# Altium PCB sanpell_cpu_v5.0.4.pcbdoc (part 2 of 2)
Units mm, origin at the board's own origin, x right, y up, seen from the top; angles counter-clockwise.
Board outline 91.48 x 91.59 mm, 4 copper layers (Top Layer, PWR, GND, Bottom Layer); 81 components, 92 nets, 356 pads, 103 vias.
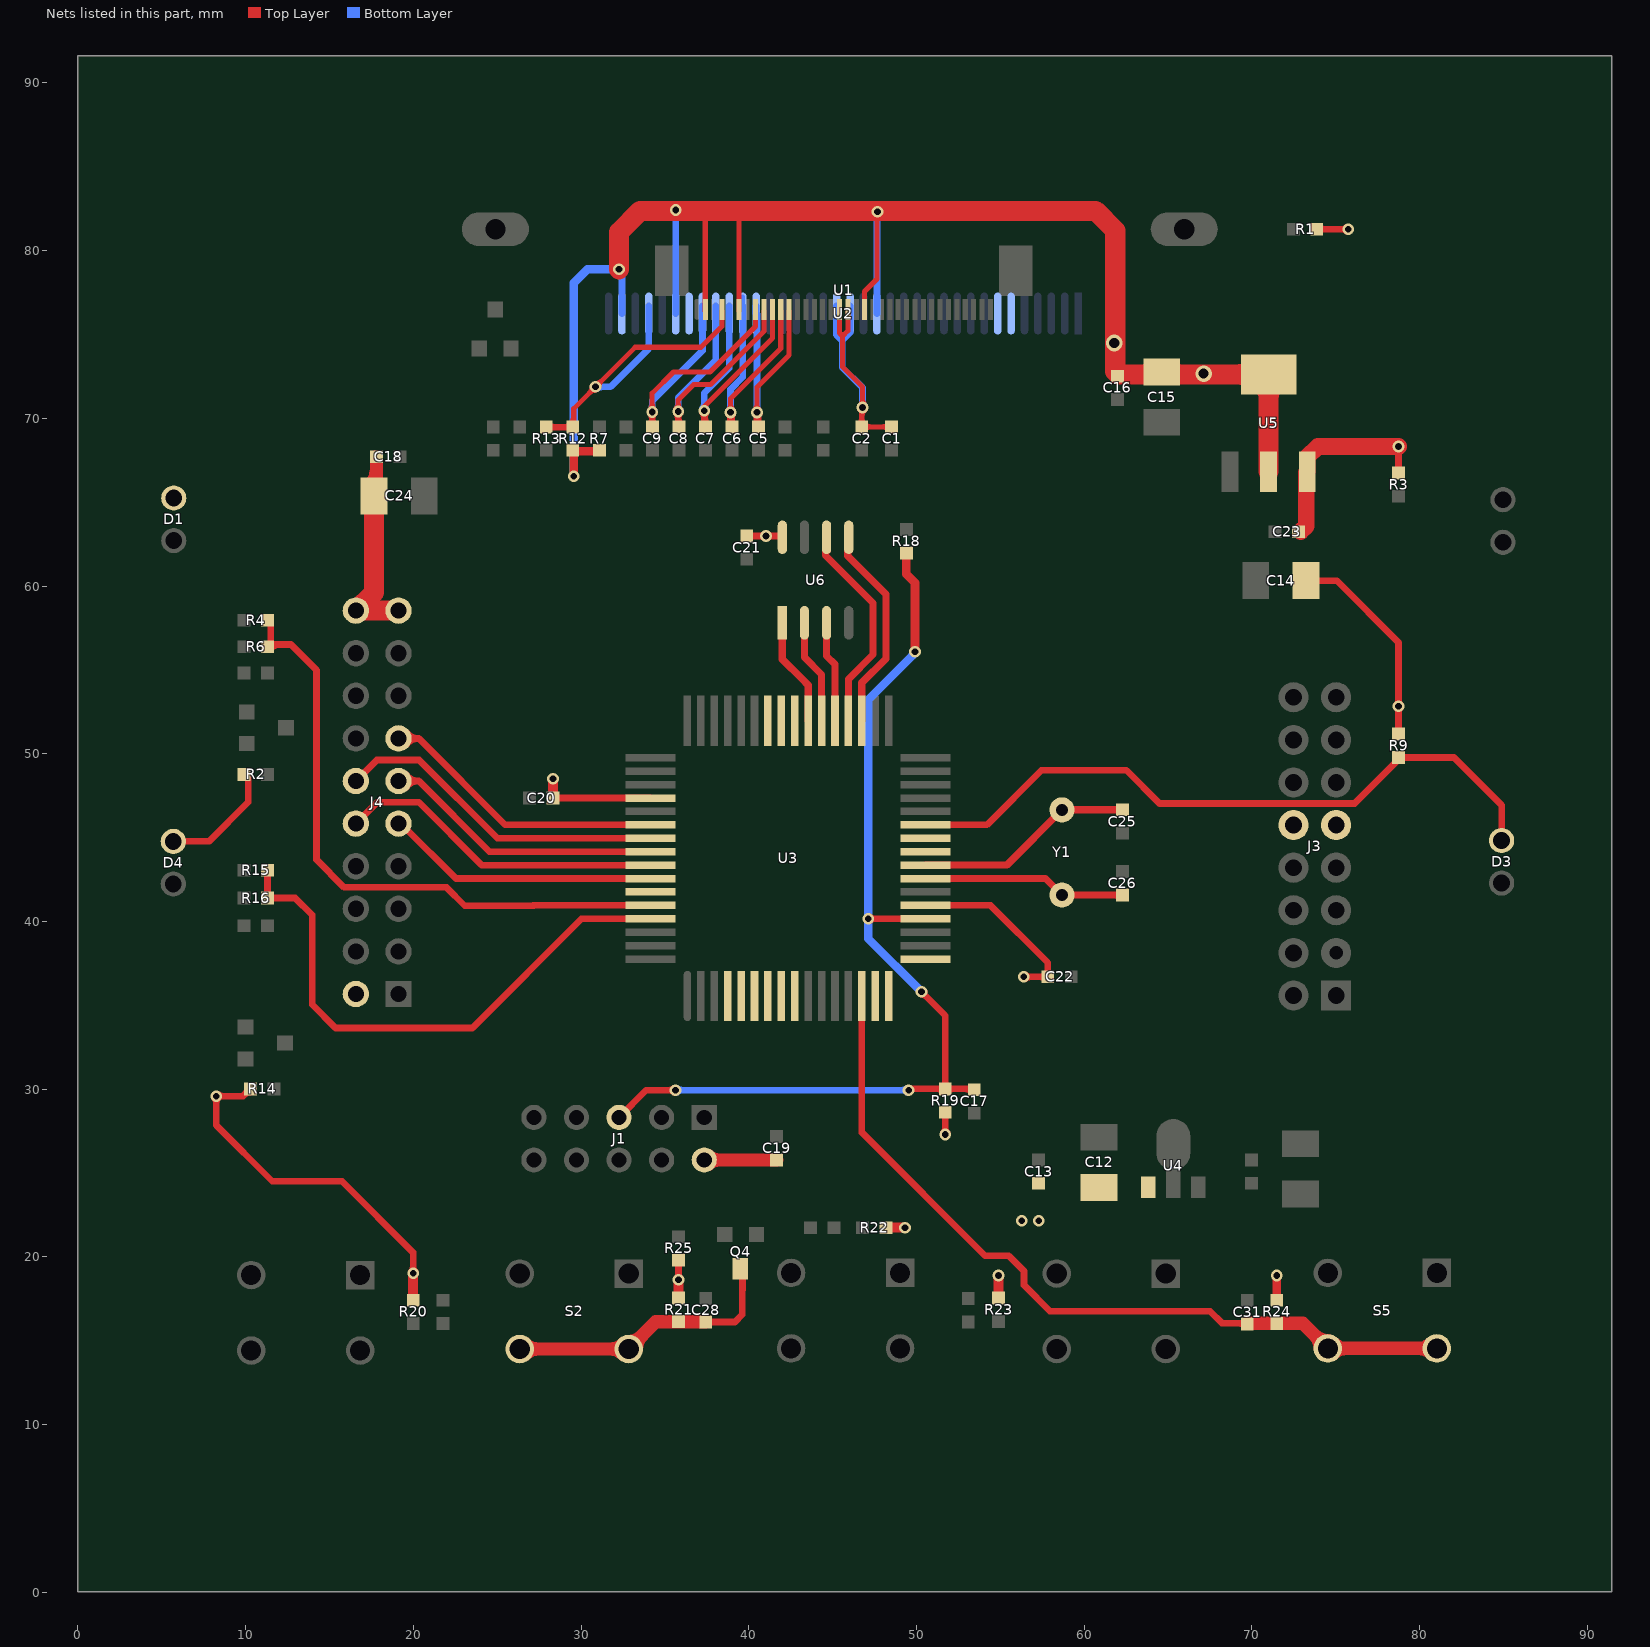
[diagram p4: the nets of this part, all layers, seen from the top]

## Via types
v1: diameter 0.7, hole 0.4, Top Layer to Bottom Layer, 99 vias
v2: diameter 1, hole 0.6, Top Layer to Bottom Layer, 4 vias

## Nets (pads, with @x,y where several pads share a name; then routed paths per layer and width w, separated by ;. In a path a pad name is that pad's centre, name@x,y a point inside that pad or via, vN(x,y) a via of type N, cw(c..) or ccw(c..) an arc to the next point about the centre after c; other vN are vias at no path point) (continued)
PB4: C31.2 R24.1 S5.2 U3.14 | length 53.9
  Top Layer w0.4: U3.14@46.742,35.564 46.742,27.426 54.102,20.066 55.507,20.066 56.407,19.166 56.407,18.32 57.963,16.764 67.508,16.764 68.219,16.053 C31.2@69.723,16.053 ; 69.163,16.053 cw(c69.163,15.442) C31.2@69.595,15.874
  Top Layer w0.508: R24.1@71.476,16.027 R24.1@71.501,16.053
  Top Layer w0.8: C31.2@69.723,16.053 71.501,16.053 73.023,16.053 S5.2@74.526,14.55 S5.2@81.026,14.55 ; S5.2@74.076,14.55 ccw(c72.99,14.55) 73.758,15.318 ccw(c74.526,16.086) S5.2@74.526,15 ; S5.2@74.844,14.232 cw(c75.612,13.464) 75.612,14.55 cw(c75.612,15.636) S5.2@74.844,14.868 ; S5.2@80.708,14.232 ccw(c79.94,13.464) 79.94,14.55 ccw(c79.94,15.636) S5.2@80.708,14.868
PB5: U3.15
PB6: U3.16
PB7: U3.17
PC0: U3.35 U6.5 | length 12.7
  Top Layer w0.432: 45.907,61.914 cw(c46.231,61.914) U6.5@46.002,62.144 ; U6.5@45.907,62.91 45.907,61.789 48.177,59.519 48.177,55.67 46.742,54.235 U3.35@46.742,51.964
PC1: U3.36 U6.6 | length 13
  Top Layer w0.432: 44.577,61.891 cw(c44.935,61.891) U6.6@44.682,62.144 ; U6.6@44.577,62.91 44.577,61.824 47.407,58.994 47.407,55.916 45.942,54.451 U3.36@45.942,51.964
PC2: U3.37 U6.3 | length 6.1
  Top Layer w0.432: U6.3@44.64,57.81 44.64,55.837 45.142,55.335 U3.37@45.142,51.964
PC3: U3.38 U6.2 | length 6.3
  Top Layer w0.432: U6.2@43.32,57.81 43.32,55.753 44.342,54.731 U3.38@44.342,51.964
PC4: U3.39 U6.1 | length 7
  Top Layer w0.432: U6.1@42,57.81 42,55.638 43.167,54.47 ; 42.824,54.813 43.167,54.47 ; U3.39@43.542,51.964 43.542,54.096 43.167,54.47
PC5: U3.40
PC6: U3.41
PC7: U3.42
PD0: U3.25
PD1: U3.26
PD2: D3.1 R9.2 U3.27 | length 41.7
  Top Layer w0.4: U3.27@50.542,45.764 54.193,45.764 57.451,49.022 62.51,49.022 64.49,47.042 76.125,47.042 78.74,49.657 R9.2@78.74,49.784 82.042,49.784 84.887,46.939 D3.1@84.887,44.831 ; R9.2@78.868,49.656 cw(c79.177,49.347) 79.177,49.784 cw(c79.177,50.221) R9.2@78.868,49.912
PE2: U3.4
PE3: U3.5
PE4: U3.6
PE5: U3.7
PE6: U3.8
PE7: U3.9
PF0: R15.1 R16.1 U3.61 | length 35.4
  Top Layer w0.4: R16.1@11.175,41.53 ccw(c10.866,41.839) 11.303,41.839 ccw(c11.74,41.839) 11.431,41.53 ccw(c11.74,41.839) 11.74,41.402 ccw(c11.74,40.965) R16.1@11.431,41.274 ; R15.1@11.175,42.925 cw(c10.866,42.616) 11.303,42.616 cw(c11.74,42.616) R15.1@11.431,42.925 ; R16.1@11.303,41.402 R15.1@11.303,43.053 ; R16.1@11.506,41.402 12.954,41.402 13.97,40.386 13.97,35.052 15.367,33.655 23.52,33.655 30.03,40.164 U3.61@34.142,40.164
PF1: R4.1 R6.1 U3.60 | length 38
  Top Layer w0.4: R6.1@11.431,56.26 cw(c12.047,55.644) 12.047,56.515 ; R6.1@11.506,56.439 R4.1@11.506,57.963 ; R6.1@11.532,56.413 11.633,56.515 12.7,56.515 14.224,54.991 14.224,43.688 15.875,42.037 21.971,42.037 23.063,40.945 27.178,40.945 27.159,40.964 U3.60@34.142,40.964
PF2: U3.59
PF3: J4.9 U3.58 | length 16.2
  Top Layer w0.4: J4.9@19.431,45.84 19.431,45.675 22.542,42.564 U3.58@34.142,42.564
PF4: J4.10 U3.57 | length 19.6
  Top Layer w0.4: J4.10@16.576,45.84 17.853,47.117 20.32,47.117 24.073,43.364 U3.57@34.142,43.364
PF5: J4.11 U3.56 | length 18.5
  Top Layer w0.4: J4.11@19.116,48.38 20.327,48.38 ; J4.11@19.577,48.016 cw(c20.327,47.424) 20.327,48.38 ; J4.11@19.577,48.743 ccw(c20.327,49.335) 20.327,48.38 ; U3.56@34.142,44.164 24.543,44.164 20.327,48.38
PF6: J4.12 U3.55 | length 20
  Top Layer w0.4: J4.12@16.576,48.38 17.825,49.629 20.348,49.629 25.013,44.964 U3.55@34.142,44.964
PF7: J4.13 U3.54 | length 18.9
  Top Layer w0.4: J4.13@19.116,50.92 20.327,50.92 ; J4.13@19.577,50.556 cw(c20.327,49.964) 20.327,50.92 ; J4.13@19.577,51.283 ccw(c20.327,51.875) 20.327,50.92 ; U3.54@34.142,45.764 25.483,45.764 20.327,50.92
PS: R12.2 R13.2 U1.33 U2.33 | length 24.8
  Top Layer w0.305: R12.2@29.349,69.656 ccw(c28.824,70.18) 29.566,70.18 ; R12.2@29.566,69.52 29.566,70.581 33.227,74.242 37.158,74.242 38.407,75.491 U1.33@38.407,76.403 ; 29.566,69.912 ccw(c29.928,69.912) R12.2@29.672,69.656 ; 30.519,71.535 ccw(c30.172,71.882) v1@30.663,71.882 ; 30.534,71.549 cw(c30.861,71.222) v1@30.861,71.684 ; v1@30.861,72.08 ccw(c30.861,72.571) 31.208,72.224 ; v1@31.059,71.882 cw(c31.521,71.882) 31.194,72.209
  Top Layer w0.4: R13.2@28.016,69.469 R12.2@29.566,69.469 ; R13.2@28.056,69.622 ccw(c28.427,69.993) 28.427,69.469 ; 29.012,69.469 ccw(c29.012,69.993) R12.2@29.382,69.622
  Bottom Layer w0.4: v1(30.861,71.882) 30.861,71.857 30.886,71.882 31.747,71.882 34.039,74.174 U2.33@34.039,76.251 ; v1@30.967,71.776 cw(c31.223,71.52) 31.223,71.882 cw(c31.223,72.244) v1@30.967,71.988 ; U2.33@34.035,76.251 U2.33@34.035,76.701
RD: U2.7
RST: C17.2 J1.5 R18.1 R19.1 U3.20 | length 66.4
  Top Layer w0.4: J1.5@32.264,28.325 33.886,29.947 v1(35.636,29.947) ; v1@35.53,29.841 ccw(c35.274,29.584) 35.274,29.947 ccw(c35.274,30.309) v1@35.53,30.053 ; v1(47.117,40.164) U3.20@50.542,40.164 ; v1@47.223,40.058 cw(c47.479,39.802) 47.479,40.164 cw(c47.479,40.526) v1@47.223,40.27 ; v1(49.53,29.947) 49.606,30.023 R19.1@51.714,30.023 ; v1@50.292,35.664 cw(c50.292,35.302) 50.548,35.558 cw(c50.804,35.814) v1@50.442,35.814 ; v1(50.292,35.814) 51.714,34.392 R19.1@51.714,30.023 ; R19.1@51.586,29.895 ccw(c51.277,29.586) 51.277,30.023 ccw(c51.277,30.46) 51.586,30.151 ccw(c51.277,30.46) 51.714,30.46 ccw(c52.151,30.46) 51.842,30.151 ccw(c52.151,30.46) 52.151,30.023 ccw(c52.151,29.586) R19.1@51.842,29.895 ; 52.882,30.023 cw(c52.882,29.412) C17.2@53.314,29.844 ; C17.2@53.391,30.023 R19.1@51.714,30.023
  Top Layer w0.508: R18.1@49.403,62.103 R18.1@49.403,61.976 49.403,60.706 49.911,60.198 v1(49.911,56.083)
  Bottom Layer w0.4: v1@35.687,29.947 v1(49.53,29.947) ; v1@35.742,29.841 cw(c35.998,29.584) 35.998,29.947 cw(c35.998,30.309) v1@35.742,30.053 ; v1@49.424,29.841 ccw(c49.168,29.584) 49.168,29.947 ccw(c49.168,30.309) v1@49.424,30.053
  Bottom Layer w0.508: v1(47.117,40.164) 47.117,53.213 49.911,56.007 v1(49.911,56.083) v1@49.987,56.083 ; v1@47.244,40.164 47.117,40.037 47.117,38.989 v1(50.292,35.814) ; 49.693,55.789 ccw(c49.399,56.083) v1@49.815,56.083
TS2: C28.2 Q4.3 R21.1 S2.2 | length 22.7
  Top Layer w0.4: C28.2@37.568,16.001 cw(c37.877,15.692) 37.877,16.129 cw(c37.877,16.566) C28.2@37.568,16.257 ; C28.2@37.592,16.129 39.173,16.129 39.611,16.567 39.611,18.161 ; Q4.3@39.497,19.304 39.624,19.177 39.624,18.034
  Top Layer w0.8: S2.2@26.346,14.513 S2.2@32.846,14.513 34.462,16.129 C28.2@37.44,16.129 ; S2.2@26.664,14.195 cw(c27.432,13.427) 27.432,14.513 cw(c27.432,15.599) S2.2@26.664,14.831 ; S2.2@32.528,14.195 ccw(c31.76,13.427) 31.76,14.513 ccw(c31.76,15.599) S2.2@32.528,14.831 ; S2.2@32.846,14.963 ccw(c32.846,16.049) 33.614,15.281 ccw(c34.382,14.513) S2.2@33.296,14.513
V0: C9.1 U1.29 U2.29 | length 20.9
  Top Layer w0.305: v1@34.099,70.523 ccw(c33.762,70.86) 34.239,70.86 ccw(c34.716,70.86) v1@34.379,70.523 ; v1(34.239,70.383) 34.239,71.501 35.509,72.771 37.694,72.771 40.407,75.484 U1.29@40.407,76.403
  Top Layer w0.4: C9.1@34.127,69.622 ccw(c33.857,69.892) 34.239,69.892 ; v1@34.133,70.277 cw(c33.877,70.021) 34.239,70.021 cw(c34.601,70.021) v1@34.345,70.277 ; C9.1@34.239,69.444 v1(34.239,70.383) ; 34.239,69.97 ccw(c34.731,69.97) C9.1@34.383,69.622
  Bottom Layer w0.4: v1@34.133,70.489 ccw(c33.877,70.746) 34.239,70.746 ccw(c34.601,70.746) v1@34.345,70.489 ; v1(34.239,70.383) 34.239,71.044 37.235,74.039 U2.29@37.235,76.701
V1: C8.1 U1.28 U2.28 | length 19.3
  Top Layer w0.305: v1@35.649,70.549 ccw(c35.312,70.886) 35.789,70.886 ccw(c36.266,70.886) v1@35.928,70.549 ; v1(35.789,70.409) 35.789,71.095 36.703,72.009 37.719,72.009 40.907,75.197 U1.28@40.907,76.403
  Top Layer w0.4: v1@35.683,70.303 cw(c35.426,70.047) 35.789,70.047 cw(c36.151,70.047) v1@35.895,70.303 ; C8.1@35.789,69.444 v1(35.789,70.409) ; 35.789,70.048 ccw(c36.391,70.048) C8.1@35.965,69.622
  Bottom Layer w0.4: v1@35.683,70.515 ccw(c35.426,70.771) 35.789,70.771 ccw(c36.151,70.771) v1@35.895,70.515 ; v1(35.789,70.409) 35.789,71.224 38.039,73.475 U2.28@38.039,76.251 ; U2.28@38.035,76.251 U2.28@38.035,76.701
V2: C7.1 U1.27 U2.27 | length 17.7
  Top Layer w0.305: v1(37.338,70.46) 37.338,70.715 41.407,74.784 U1.27@41.407,76.403
  Top Layer w0.4: v1@37.232,70.354 cw(c36.976,70.097) 37.338,70.097 cw(c37.7,70.097) v1@37.444,70.354 ; C7.1@37.338,69.444 v1(37.338,70.46) ; v1@37.338,70.126 ccw(c38.051,70.126) C7.1@37.547,69.622 ; 37.395,69.914 cw(c37.963,70.067) v1@37.465,70.38
  Bottom Layer w0.4: v1@37.232,70.566 ccw(c36.976,70.822) 37.338,70.822 ccw(c37.7,70.822) v1@37.444,70.566 ; v1(37.338,70.46) 37.338,71.501 38.835,72.998 U2.27@38.835,76.701
V3: C6.1 U1.26 U2.26 | length 18.7
  Top Layer w0.305: v1@38.773,70.498 ccw(c38.436,70.835) 38.913,70.835 ccw(c39.39,70.835) v1@39.053,70.498 ; v1(38.913,70.358) 38.913,71.177 41.907,74.171 U1.26@41.907,76.403
  Top Layer w0.4: v1@38.807,70.252 cw(c38.551,69.996) 38.913,69.996 cw(c39.275,69.996) v1@39.019,70.252 ; C6.1@38.913,69.469 v1(38.913,70.358) ; v1@38.913,70.143 ccw(c39.649,70.143) C6.1@39.129,69.622 ; C6.1@38.987,69.868 cw(c39.511,70.008) v1@39.042,70.282
  Bottom Layer w0.254: U2.26@39.639,76.251 U2.26@39.639,77.257
  Bottom Layer w0.4: v1@38.807,70.464 ccw(c38.551,70.72) 38.913,70.72 ccw(c39.275,70.72) v1@39.019,70.464 ; v1(38.913,70.358) 38.913,71.73 39.639,72.456 U2.26@39.639,76.251 ; U2.26@39.635,76.251 U2.26@39.635,76.701
V4: C5.1 U1.25 U2.25 | length 17
  Top Layer w0.305: v1@40.348,70.498 ccw(c40.011,70.835) 40.488,70.835 ccw(c40.965,70.835) v1@40.627,70.498 ; v1(40.488,70.358) 40.488,71.857 42.407,73.776 U1.25@42.407,76.403
  Top Layer w0.4: v1@40.382,70.252 cw(c40.125,69.996) 40.488,69.996 cw(c40.85,69.996) v1@40.594,70.252 ; C5.1@40.488,69.469 v1(40.488,70.358) ; v1@40.488,70.16 ccw(c41.248,70.16) C5.1@40.71,69.622 ; C5.1@40.564,69.875 cw(c41.083,70.014) v1@40.618,70.283
  Bottom Layer w0.4: v1@40.382,70.464 ccw(c40.125,70.72) 40.488,70.72 ccw(c40.85,70.72) v1@40.594,70.464 ; U2.25@40.435,76.251 U2.25@40.435,76.701 ; U2.25@40.439,76.251 40.488,76.202 v1(40.488,70.358)
VCC: C12.1 C13.2 C14.1 C18.2 C19.2 C20.2 C21.2 C22.2 C23.2 C24.1 D1.1 D4.1 J1.2 J4.19 J4.20 R1.1 R2.2 R3.1 R9.1 R14.2 R19.2 R20.2 R21.2 R22.2 R23.2 R24.2 R25.2 U3.21 U3.52 U4.3 U5.3 U6.8 | length 115
  Top Layer w0.4: D4.1@5.69,44.78 7.823,44.78 10.16,47.117 R2.2@10.16,48.768 ; v1@8.149,29.485 cw(c7.893,29.229) 8.255,29.229 cw(c8.617,29.229) 8.361,29.485 cw(c8.617,29.229) 8.617,29.591 cw(c8.617,29.953) v1@8.361,29.697 ; R14.2@10.106,30.023 cw(c9.669,30.023) 9.978,29.714 cw(c10.287,29.405) R14.2@10.287,29.842 ; R14.2@10.287,30.023 9.855,29.591 v1(8.255,29.591) 8.255,27.848 11.586,24.517 15.742,24.517 19.99,20.269 v1(19.99,19.025) ; v1@19.884,19.131 ccw(c19.628,19.387) 19.99,19.387 ccw(c20.352,19.387) v1@20.096,19.131 ; C20.2@28.448,47.364 U3.52@34.142,47.364 ; C20.2@28.449,47.236 cw(c28.758,46.927) 28.758,47.364 cw(c28.758,47.801) C20.2@28.449,47.492 ; R25.2@35.686,19.684 cw(c35.377,19.375) 35.814,19.375 cw(c36.251,19.375) R25.2@35.942,19.684 ; v1@35.708,18.756 ccw(c35.452,19.012) 35.814,19.012 ccw(c36.176,19.012) v1@35.92,18.756 ; v1(35.814,18.65) R25.2@35.814,19.685 ; C21.2@40.006,62.864 cw(c40.315,62.555) 40.315,62.992 cw(c40.315,63.429) C21.2@40.006,63.12 ; C21.2@40.208,62.992 v1(41.021,62.992) U6.8@42.037,62.992 ; v1@40.915,62.886 ccw(c40.659,62.63) 40.659,62.992 ccw(c40.659,63.354) v1@40.915,63.098 ; v1@41.127,62.886 cw(c41.383,62.63) 41.383,62.992 cw(c41.383,63.354) v1@41.127,63.098 ; 41.622,62.992 cw(c41.622,62.532) U6.8@41.947,62.857 ; U3.21@50.542,40.964 54.413,40.964 57.828,37.549 C22.2@57.828,36.703 v1@56.407,36.703 ; R19.2@51.586,28.498 cw(c51.277,28.189) 51.714,28.189 cw(c52.151,28.189) R19.2@51.842,28.498 ; v1@51.608,27.411 ccw(c51.352,27.667) 51.714,27.667 ccw(c52.077,27.667) v1@51.82,27.411 ; v1(51.714,27.305) R19.2@51.714,28.626 ; v1@56.494,36.597 cw(c56.75,36.341) 56.75,36.703 cw(c56.75,37.065) v1@56.494,36.809 ; C22.2@57.7,36.575 ccw(c57.391,36.266) 57.391,36.703 ccw(c57.391,37.14) 57.7,36.831 ccw(c57.391,37.14) 57.828,37.14 ccw(c58.265,37.14) C22.2@57.956,36.831 ; C14.1@73.231,60.325 75.057,60.325 78.74,56.642 v1(78.74,52.832) R9.1@78.74,51.181 R9.1@78.74,51.054 ; R1.1@73.868,81.28 v1(75.748,81.28) ; R1.1@73.996,81.152 cw(c74.305,80.843) 74.305,81.28 cw(c74.305,81.717) R1.1@73.996,81.408 ; v1@75.642,81.174 ccw(c75.386,80.918) 75.386,81.28 ccw(c75.386,81.642) v1@75.642,81.386 ; R9.1@78.612,51.309 ccw(c78.303,51.618) 78.74,51.618 ccw(c79.177,51.618) R9.1@78.868,51.309 ; R3.1@78.612,66.879 ccw(c78.303,67.188) 78.74,67.188 ccw(c79.177,67.188) R3.1@78.868,66.879 ; v1@78.634,52.726 cw(c78.378,52.47) 78.74,52.47 cw(c79.102,52.47) v1@78.846,52.726 ; v1@78.634,52.938 ccw(c78.378,53.194) 78.74,53.194 ccw(c79.102,53.194) v1@78.846,52.938 ; v1@78.634,68.22 cw(c78.378,67.964) 78.74,67.964 cw(c79.102,67.964) v1@78.846,68.22 ; R3.1@78.74,66.878 v1(78.74,68.326)
  Top Layer w0.508: R24.2@71.476,17.424 v1(71.476,18.898)
  Top Layer w0.6: R20.2@19.99,17.424 v1(19.99,19.025) ; C20.2@28.321,47.364 v1(28.321,48.514) ; R21.2@35.814,17.551 v1(35.814,18.65) ; R22.2@48.177,21.75 v1(49.309,21.75) ; R23.2@54.889,17.551 v1(54.889,18.898)
  Top Layer w0.8: C24.1@17.37,65.962 ccw(c16.319,67.013) 17.805,67.013 ; C24.1@17.805,65.532 C18.2@17.805,67.716 ; J1.2@37.348,25.781 C19.2@41.656,25.781 ; J1.2@37.591,25.537 cw(c38.18,24.949) 38.18,25.781 ; J1.2@37.591,26.032 ccw(c38.198,26.639) 38.198,25.781
  Top Layer w1: C23.2@72.906,63.246 73.239,63.58 U5.3@73.239,66.769 ; U5.3@73.293,66.823 73.293,67.691 73.928,68.326 v1(78.74,68.326)
  Top Layer w1.2: C24.1@17.719,65.314 C24.1@17.653,65.38 17.653,59.617 J4.20@16.576,58.54 J4.19@19.116,58.54
  other v1: 56.269,22.155 57.285,22.155 56.388,36.703
VCC33: C15.1 C16.1 R7.1 R12.1 U1.16 U1.31 U1.35 U2.16 U2.31 U2.35 U5.2 U5.4 | length 115.4
  Top Layer w0.305: U1.35@37.407,76.403 U1.35@37.407,76.504 37.407,82.136 ; U1.31@39.407,76.403 U1.31@39.407,76.504 39.407,81.954 ; U1.16@46.907,76.403 U1.16@46.907,76.504 46.907,77.565 47.65,78.308 v1@47.65,82.296 ; v1@47.536,82.182 cw(c47.26,81.906) 47.65,81.906 ; 47.65,81.783 cw(c48.214,81.783) v1@47.816,82.182
  Top Layer w0.508: R12.1@29.42,68.008 cw(c29.07,67.657) 29.566,67.657 ; v1(29.566,66.548) R12.1@29.566,68.072 ; R12.1@29.591,68.047 R7.1@31.115,68.047 ; R12.1@29.6,68.187 ccw(c29.939,68.527) 29.939,68.047 ; 30.663,68.047 ccw(c30.663,68.527) R7.1@31.002,68.187
  Top Layer w1.2: v1(32.264,78.892) 32.264,81.108 33.528,82.372 60.681,82.372 61.849,81.204 61.849,72.796 62.022,72.623 U5.4@70.993,72.623 ; 63.484,72.623 ccw(c63.484,73.611) C15.1@64.182,72.912 ; C15.1@65.065,72.912 ccw(c65.764,73.611) 65.764,72.623 ; U5.4@70.119,72.199 ccw(c69.094,71.174) 69.094,72.623 ccw(c69.094,74.072) U5.4@70.119,73.047 ; U5.4@70.569,72.199 cw(c69.544,71.174) 70.993,71.174 cw(c72.442,71.174) U5.4@71.417,72.199 ; U5.2@70.993,66.823 U5.4@70.993,72.623 ; U5.4@71.247,72.623 U5.4@70.993,72.623
  Bottom Layer w0.4: v1(32.264,78.892) 32.439,78.717 U2.35@32.439,76.251 ; v1@35.533,82.314 cw(c35.277,82.058) 35.639,82.058 cw(c36.001,82.058) v1@35.745,82.314 ; U2.31@35.639,76.251 v1(35.639,82.42) ; U2.16@47.639,76.251 v1@47.639,82.285 ; 47.639,81.871 cw(c48.126,81.871) v1@47.782,82.215
  Bottom Layer w0.508: v1(29.566,66.548) 29.566,78.08 30.378,78.892 v1(32.264,78.892)
  other v1: 47.676,82.321
  other v2: 67.123,72.665 61.789,74.49
VE: J3.9 J3.10 J4.2
VOUT1: C1.1 C2.1 U1.18 U1.19 U2.18 U2.19 | length 25.3
  Top Layer w0.305: U1.19@45.407,76.403 45.407,75.091 45.593,74.905 ; U1.18@45.907,76.403 45.907,75.218 45.593,74.905 ; C2.1@46.574,69.656 ccw(c46.184,70.046) 46.736,70.046 ccw(c47.288,70.046) 46.898,69.656 ccw(c47.288,70.046) 47.288,69.494 ccw(c47.288,68.943) C2.1@46.898,69.333 ; v1@46.645,70.515 cw(c46.424,70.295) 46.736,70.295 ; v1@46.645,70.795 ccw(c46.307,71.132) 46.784,71.132 ccw(c47.261,71.132) v1@46.924,70.795 ; 46.736,70.061 cw(c47.378,70.061) v1@46.924,70.515 ; C1.1@48.352,69.333 ccw(c47.962,68.943) 47.962,69.494 ccw(c47.962,70.046) C1.1@48.352,69.656 ; C1.1@48.514,69.494 C2.1@46.736,69.494 46.736,70.607 v1(46.784,70.655) 46.784,71.882 45.593,73.073 45.593,74.905
  Bottom Layer w0.4: U2.19@45.235,76.701 45.235,74.978 45.568,74.646 ; U2.19@45.264,75.226 ccw(c45.932,75.226) 45.46,74.753 ; 45.92,74.998 ccw(c45.692,75.226) U2.18@46.014,75.226 ; U2.18@46.035,76.701 46.035,75.113 45.568,74.646 ; v1@46.678,70.761 ccw(c46.422,71.017) 46.784,71.017 ccw(c47.147,71.017) v1@46.89,70.761 ; v1(46.784,70.655) 46.784,71.834 45.568,73.05 45.568,74.646
VR: U2.30
WR: U2.6
X1: C25.1 U3.24 Y1.1 | length 13.6
  Top Layer w0.432: U3.24@50.542,43.364 55.378,43.364 Y1.1@58.674,46.66 C25.1@62.179,46.66 ; C25.1@62.164,46.543 ccw(c61.882,46.261) 61.882,46.66 ccw(c61.882,47.058) C25.1@62.164,46.777
X2: C26.2 U3.23 Y1.2 | length 12.8
  Top Layer w0.432: U3.23@50.542,42.564 57.69,42.564 Y1.2@58.674,41.58 C26.2@62.281,41.58 ; C26.2@62.164,41.463 ccw(c61.882,41.181) 61.882,41.58 ccw(c61.882,41.978) C26.2@62.164,41.697
pads on no net: J1.3 U1.1 U1.2 U1.6 U1.7 U1.8 U1.9 U1.10 U1.11 U1.12 U1.13 U1.24 U1.30 U1.36 U1.37 U1.38 U2.1 U2.2 U2.24 U2.36 U3.1 U3.18 U3.19 U3.33 U3.43 U3.62 U3.63 U3.64

## Polygon pours and split planes (outlines as drawn)
+12V on Top Layer "Top Layer-No Net" (hatched 90Degree grid 0.3 track 0.3, remove dead copper, pour order 13): 76.309,25.406 76.309,21.342 76.309,21.215 66.022,21.215 66.022,23.374 67.546,23.374 67.546,25.406
VCC on Top Layer "Top Layer-No Net" (hatched 90Degree grid 0.3 track 0.3, remove dead copper, pour order 12): 54.973,25.279 63.101,25.279 63.101,23.374 63.101,23.247 64.752,23.247 64.752,21.342 55.1,21.342 54.973,21.469
+12V on Top Layer "Top Layer-+12V" (hatched 90Degree grid 0.508 track 0.508, remove dead copper, pour order 9): -143.993,-140.749
VCC on Top Layer "Top Layer-VCC" (hatched 90Degree grid 0.508 track 0.508, remove dead copper, pour order 10): -143.993,-140.749
VCC33 on Top Layer "Top Layer-No Net 1" (hatched 90Degree grid 0.3 track 0.3, remove dead copper, pour order 14): 75.438,70.358 67.377,70.358 67.377,74.235 67.545,74.422 67.608,74.492 74.526,74.492 75.319,74.492 75.381,74.422
GND on Top Layer "GND" (solid, remove dead copper, pour order 11): -0.635,91.694 90.17,91.694 90.805,91.059 91.186,90.678 91.186,0.508 0.889,0.508 0.762,0.381
GND on Bottom Layer "GND" (solid, remove dead copper, pour order 8): 0.127,91.186 0.254,91.313 91.313,91.313 91.313,0.638 91.821,0.13 91.691,0 0.381,0
+12V on PWR (split plane): 23.243,32.108 16.66,25.525 8.382,25.525 8.317,25.517 8.256,25.491 8.204,25.451 8.164,25.399 8.138,25.338 8.13,25.273 8.13,16.002 8.138,15.937 8.164,15.876 8.204,15.824 13.03,10.998 13.082,10.958 13.143,10.932 13.208,10.924 78.74,10.924 78.805,10.932 78.866,10.958 78.918,10.998 82.982,15.062 83.022,15.114 83.048,15.175 83.056,15.24 83.056,22.352 83.048,22.417 83.022,22.478 82.982,22.53 82.93,22.57 82.869,22.596 82.804,22.604 69.975,22.604 69.975,37.975 79.123,37.975 79.123,35.56 79.131,35.495 79.157,35.434 79.197,35.382 79.249,35.342 79.31,35.316 79.375,35.308 87.124,35.308 87.124,16.233 75.207,4.316 59.286,4.316 54.661,8.941 54.609,8.981 54.548,9.007 54.483,9.015 32.639,9.015 32.574,9.007 32.513,8.981 32.461,8.941 27.836,4.316 17.122,4.316 5.713,15.725 5.713,27.815 11.811,27.815 11.876,27.823 11.937,27.849 11.989,27.889 17.503,33.403 20.955,33.403 21.02,33.411 21.081,33.437 21.133,33.477 21.173,33.529 21.199,33.59 21.207,33.655 21.207,36.957 21.199,37.022 21.173,37.083 21.133,37.135 21.006,37.262 20.954,37.302 20.893,37.328 20.828,37.336 14.476,37.336 14.476,40.515 23.243,40.515
-12V on PWR (split plane): 25.783,30.076 19.073,23.366 11.176,23.366 11.111,23.358 11.05,23.332 10.998,23.292 10.958,23.24 10.932,23.179 10.924,23.114 10.924,16.383 10.932,16.318 10.958,16.257 10.998,16.205 13.03,14.173 13.082,14.133 13.143,14.107 13.208,14.099 77.597,14.099 77.662,14.107 77.723,14.133 77.775,14.173 79.807,16.205 79.847,16.257 79.873,16.318 79.881,16.383 79.881,19.812 79.873,19.877 79.847,19.938 79.807,19.99 79.755,20.03 79.694,20.056 79.629,20.064 68.197,20.064 68.197,41.785 79.123,41.785 79.123,38.479 69.723,38.479 69.658,38.471 69.597,38.445 69.545,38.405 69.505,38.353 69.479,38.292 69.471,38.227 69.471,22.352 69.479,22.287 69.505,22.226 69.545,22.174 69.597,22.134 69.658,22.108 69.723,22.1 82.552,22.1 82.552,15.344 78.636,11.428 13.312,11.428 8.634,16.106 8.634,25.021 16.764,25.021 16.829,25.029 16.89,25.055 16.942,25.095 23.673,31.826 23.713,31.878 23.739,31.939 23.747,32.004 23.747,40.767 23.739,40.832 23.713,40.893 23.673,40.945 23.621,40.985 23.56,41.011 23.495,41.019 14.476,41.019 14.476,44.325 25.783,44.325
no net on PWR (split plane): 90.947,0.552 76.981,0.552 90.947,14.517
+24V on PWR (split plane): 82.425,40.894 82.433,40.829 82.459,40.768 82.499,40.716 83.642,39.573 83.694,39.533 83.755,39.507 83.82,39.499 90.947,39.499 90.947,15.231 76.268,0.552 15.299,0.552 0.491,15.36 0.491,30.863 8.255,30.863 8.32,30.871 8.381,30.897 8.433,30.937 14.328,36.832 20.703,36.832 20.703,33.907 17.399,33.907 17.334,33.899 17.273,33.873 17.221,33.833 11.707,28.319 5.461,28.319 5.396,28.311 5.335,28.285 5.283,28.245 5.243,28.193 5.217,28.132 5.209,28.067 5.209,15.621 5.217,15.556 5.243,15.495 5.283,15.443 16.84,3.886 16.892,3.846 16.953,3.82 17.018,3.812 27.94,3.812 28.005,3.82 28.066,3.846 28.118,3.886 32.743,8.511 54.379,8.511 59.004,3.886 59.056,3.846 59.117,3.82 59.182,3.812 75.311,3.812 75.376,3.82 75.437,3.846 75.489,3.886 87.554,15.951 87.572,15.973 87.594,16.003 87.62,16.064 87.628,16.129 87.628,35.56 87.62,35.625 87.594,35.686 87.554,35.738 87.502,35.778 87.441,35.804 87.376,35.812 79.627,35.812 79.627,42.037 79.619,42.102 79.593,42.163 79.553,42.215 79.501,42.255 79.44,42.281 79.375,42.289 70.61,42.289 70.61,45.595 82.425,45.595
VCC on PWR (split plane): 90.947,40.003 83.924,40.003 82.929,40.998 82.929,45.847 82.921,45.912 82.895,45.973 82.855,46.025 82.803,46.065 82.742,46.091 82.677,46.099 70.358,46.099 70.293,46.091 70.232,46.065 70.18,46.025 70.14,45.973 70.114,45.912 70.106,45.847 70.106,42.289 67.945,42.289 67.88,42.281 67.819,42.255 67.767,42.215 67.727,42.163 67.701,42.102 67.693,42.037 67.693,19.812 67.701,19.747 67.727,19.686 67.767,19.634 67.819,19.594 67.88,19.568 67.945,19.56 79.377,19.56 79.377,16.487 77.493,14.603 13.312,14.603 11.428,16.487 11.428,22.862 19.177,22.862 19.242,22.87 19.303,22.896 19.355,22.936 26.213,29.794 26.253,29.846 26.279,29.907 26.287,29.972 26.287,44.577 26.279,44.642 26.253,44.703 26.213,44.755 26.161,44.795 26.1,44.821 26.035,44.829 14.224,44.829 14.159,44.821 14.098,44.795 14.046,44.755 14.006,44.703 13.98,44.642 13.972,44.577 13.972,40.767 13.972,37.188 8.151,31.367 0.491,31.367 0.491,91.122 90.947,91.122
no net on PWR (split plane): 14.586,0.552 0.491,0.552 0.491,14.646
no net on GND (split plane): 14.586,0.552 0.491,0.552 0.491,14.646
no net on GND (split plane): 90.947,0.552 77.108,0.552 90.947,14.39
GND on GND (split plane): 90.947,40.003 83.924,40.003 82.929,40.998 82.929,46.863 82.921,46.928 82.895,46.989 82.855,47.041 82.803,47.081 82.742,47.107 82.677,47.115 70.358,47.115 70.293,47.107 70.232,47.081 70.18,47.041 70.14,46.989 70.114,46.928 70.106,46.863 70.106,42.037 70.114,41.972 70.14,41.911 70.18,41.859 70.232,41.819 70.293,41.793 70.358,41.785 79.123,41.785 79.123,35.56 79.131,35.495 79.157,35.434 79.197,35.382 79.249,35.342 79.31,35.316 79.375,35.308 87.251,35.308 87.251,16.487 79.779,9.015 33.02,9.015 32.955,9.007 32.894,8.981 32.842,8.941 28.09,4.189 17.122,4.189 5.586,15.725 5.586,27.561 11.811,27.561 11.876,27.569 11.937,27.595 11.989,27.635 17.757,33.403 20.828,33.403 20.893,33.411 20.954,33.437 21.006,33.477 21.046,33.529 21.072,33.59 21.08,33.655 21.08,36.957 21.072,37.022 21.046,37.083 21.006,37.135 20.954,37.175 20.893,37.201 20.828,37.209 14.478,37.209 14.413,37.201 14.352,37.175 14.3,37.135 8.405,31.24 0.491,31.24 0.491,91.122 90.947,91.122
VE on GND (split plane): 82.425,40.894 82.433,40.829 82.459,40.768 82.499,40.716 83.642,39.573 83.694,39.533 83.755,39.507 83.82,39.499 90.947,39.499 90.947,15.104 76.395,0.552 15.299,0.552 0.491,15.36 0.491,30.736 8.509,30.736 8.574,30.744 8.635,30.77 8.687,30.81 14.582,36.705 20.576,36.705 20.576,33.907 17.653,33.907 17.588,33.899 17.527,33.873 17.475,33.833 11.707,28.065 5.334,28.065 5.269,28.057 5.208,28.031 5.156,27.991 5.116,27.939 5.09,27.878 5.082,27.813 5.082,15.621 5.09,15.556 5.116,15.495 5.156,15.443 16.84,3.759 16.862,3.741 16.892,3.719 16.953,3.693 17.018,3.685 28.194,3.685 28.259,3.693 28.32,3.719 28.372,3.759 33.124,8.511 79.883,8.511 79.948,8.519 80.009,8.545 80.061,8.585 87.681,16.205 87.721,16.257 87.747,16.318 87.755,16.383 87.755,35.56 87.747,35.625 87.721,35.686 87.681,35.738 87.629,35.778 87.568,35.804 87.503,35.812 79.627,35.812 79.627,42.037 79.619,42.102 79.593,42.163 79.553,42.215 79.501,42.255 79.44,42.281 79.375,42.289 70.61,42.289 70.61,46.611 82.425,46.611

## Keep-outs
Keep-Out Layer:
  circle w0.127: c4.624,76.73 r1.8
  circle w0.127: c21.694,6.18 r1.5
  circle w0.127: c69.719,6.18 r1.5
  circle w0.127: c86.869,76.705 r1.8
  circle w0.127: c45.719,2.48 r1.8
  circle w0.127: c79.519,81.58 r1.25
  circle w0.127: c11.419,81.555 r1.25
  circle w0.127: c79.619,36.455 r1.25
  circle w0.127: c11.544,36.53 r1.25
  lines w0.102: 0.044,11.43 0.054,80.205 ; 11.369,0.119 80.069,0.13 ; 91.366,11.455 91.369,80.155
  lines w0.127: 0.044,11.405 ccw(c2.444,11.405) 2.444,9.005 ; 0.069,80.155 cw(c2.469,80.155) 2.469,82.555 ; 2.479,8.996 cw(c2.479,2.496) 8.979,2.496 ; 2.479,82.557 ccw(c2.479,89.057) 8.979,89.057 ; 8.969,2.505 ccw(c11.369,2.505) 11.369,0.105 ; 8.994,89.08 cw(c11.394,89.08) 11.394,91.48 ; 80.069,0.13 ccw(c80.069,2.53) 82.469,2.53 ; 80.069,91.48 cw(c80.069,89.08) 82.469,89.08 ; 82.466,2.496 cw(c88.966,2.496) 88.966,8.996 ; 82.466,89.057 ccw(c88.966,89.057) 88.966,82.557 ; 88.969,9.005 ccw(c88.969,11.405) 91.369,11.405 ; 88.994,82.555 cw(c88.994,80.155) 91.394,80.155
  lines w0.305: 11.394,91.48 29.439,91.48 34.377,91.48 35.281,90.576 37.414,90.576 56.439,90.576 57.342,91.48 80.144,91.48

## Other copper
Top Layer:
  pour cut-out: 77.216,25.96 77.165,25.909 77.165,20.351 54.563,20.351 54.046,20.869 54.046,25.96
PWR (plane layer: these items are gaps in the copper):
  lines w0.5: 79.375,38.227 69.723,38.227 69.723,22.352 82.804,22.352 82.804,15.24 78.74,11.176 13.208,11.176 8.382,16.002 8.382,25.273 16.764,25.273 23.495,32.004 23.495,40.767 14.224,40.767 ; 14.224,37.084 8.255,31.115 0.107,31.115 0.107,15.387 15.494,0 76.073,0 91.367,15.294 91.367,39.751 83.82,39.751 82.677,40.894 82.677,45.847 70.358,45.847 70.358,42.037 ; 14.224,37.084 20.828,37.084 20.955,36.957 20.955,33.655 17.399,33.655 11.811,28.067 5.461,28.067 5.461,15.621 17.018,4.064 27.94,4.064 32.639,8.763 54.483,8.763 59.182,4.064 75.311,4.064 87.376,16.129 87.376,35.56 79.375,35.56 79.375,42.037 70.358,42.037 ; 14.224,37.084 14.224,40.767 ; 14.224,40.767 14.224,44.577 26.035,44.577 26.035,29.972 19.177,23.114 11.176,23.114 11.176,16.383 13.208,14.351 77.597,14.351 79.629,16.383 79.629,19.812 67.945,19.812 67.945,42.037 70.358,42.037
GND (plane layer: these items are gaps in the copper):
  lines w0.5: -0.02,15.514 15.453,0.041 76.241,0.041 91.457,15.257 91.457,39.751 83.82,39.751 82.677,40.894 82.677,46.863 70.358,46.863 70.358,42.037 79.375,42.037 79.375,35.56 87.503,35.56 87.503,16.383 79.883,8.763 33.02,8.763 28.194,3.937 17.018,3.937 5.334,15.621 5.334,27.813 11.811,27.813 17.653,33.655 20.828,33.655 20.828,36.957 14.478,36.957 8.509,30.988 -0.02,30.988 -0.02,15.514

## Silkscreen, mask and mechanical layers (free items; w line width, h text height)
Top Overlay:
  text "Sanpell_CPU_V5.0.4" at 27.178,85.151 h1.98
  text "K" at 20.701,80.899 h1.52
  text "A" at 69.596,80.772 h1.52
Mechanical 1:
  lines w0.2: -3.048,43.561 94.488,43.561 ; -2.794,63.906 94.463,63.906 ; 5.715,-3.048 5.715,94.922 ; 84.912,-1.524 84.912,94.818
  lines w0.254: 14.605,16.789 95.275,16.789 ; 21.717,81.28 69.977,81.28

## Dimensions
-5.105,43.586 to -2.692,63.906 on Mechanical 1
-0.02,0.041 to -2.921,43.561 on Mechanical 1
84.912,-1.524 to 91.457,-1.397 on Mechanical 1
-0.02,-2.286 to 5.715,-2.921 on Mechanical 1
-0.02,0.041 to 91.457,0.041 on Mechanical 1
61.754,12.7 to 77.788,15.062 on Mechanical 1
45.727,12.547 to 61.761,14.91 on Mechanical 1
29.674,12.471 to 45.708,14.834 on Mechanical 1
13.647,12.369 to 29.681,14.732 on Mechanical 1
-0.019,12.369 to 13.653,14.63 on Mechanical 1
2.952,0.117 to 14.58,16.789 on Mechanical 1